# Altium PCB v0.0.PcbDoc
Units mil, origin at the board's own origin, x right, y up, seen from the top; angles counter-clockwise.
Board outline 6000 x 4000 mil, 2 copper layers (Top Layer, Bottom Layer); 48 components, 45 nets, 189 pads, 19 vias.
Unrouted connection lines stored in the file: 83.
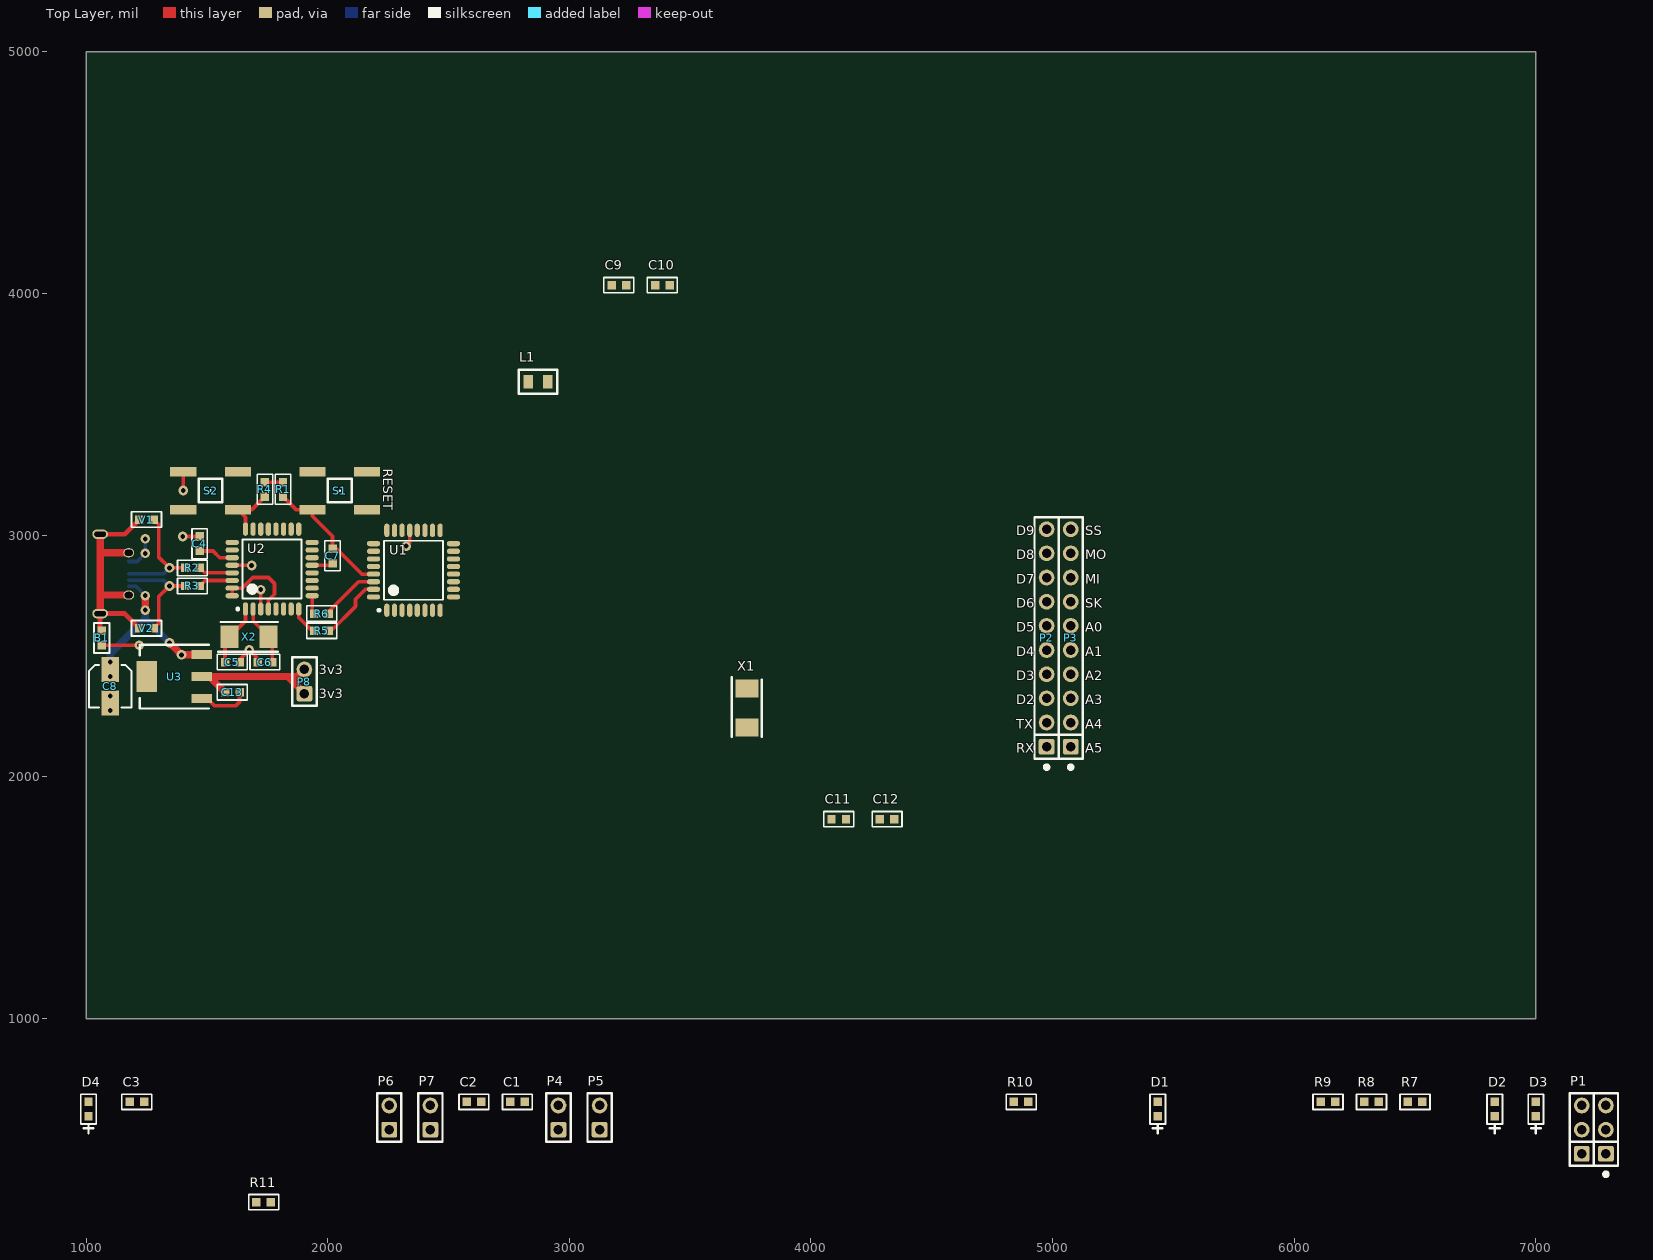
[diagram p0: Top Layer view]
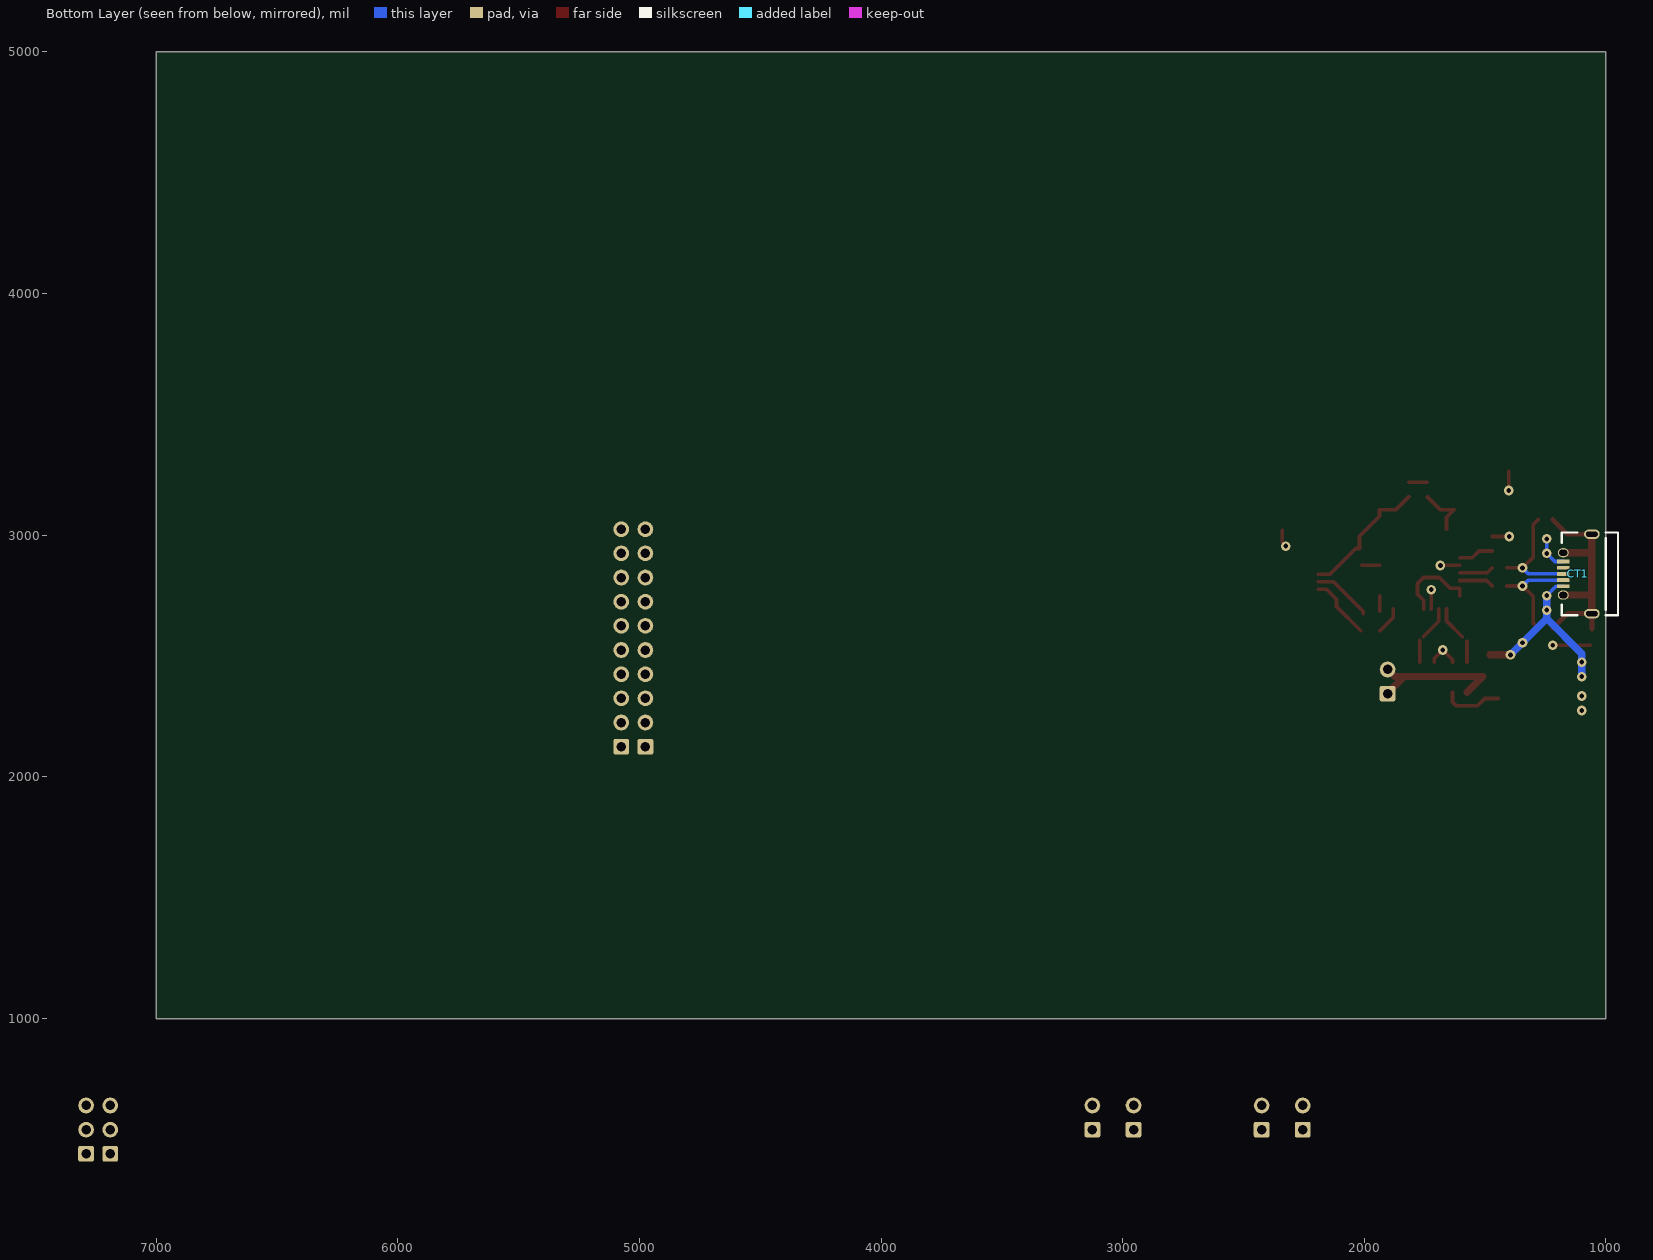
[diagram p1: Bottom Layer view, seen from below]

## Layer stack, top to bottom
Top Solder: solder mask 0.4, Solder Resist, Dk 3.5
Top Layer: signal copper 1.4
Dielectric 1: dielectric 12.6, FR-4, Dk 4.8
Bottom Layer: signal copper 1.4
Bottom Solder: solder mask 0.4, Solder Resist, Dk 3.5

## Board outline
1000,1000 7000,1000 7000,5000 1000,5000

## Design rules (kind name [scope] priority, off if disabled: settings)
Clearance [All] p1: gap=10 ignorepadtopadclearanceinfootprint=FALSE except(0: Arc-Hole Track-Hole SMDPad-Hole THPad-Hole Via-Hole Fill-Hole Poly-Hole Region-Hole Text-Hole)
PolygonConnect [All] p1: connectstyle=Relief reliefconductorwidth=10 reliefentries=4 polygonreliefangle="90 Angle" airgapwidth=10
RoutingVias [All] p1: holewidth=28 width=50 viastyle="Through Hole" minholewidth=28 minwidth=50 maxholewidth=28 maxwidth=50
SolderMaskExpansion [All] p1: expansion=4
Width [All] p1: maxlimit=50 minlimit=10 preferedwidth=15 minimp=50.000000 maximp=50.000000 favimp=50.000000
30 further rules are at their usual default settings.

## Components (designator, comment, footprint, x,y, rotation, side; value= is the part's Value field where it differs from the comment)
B1 "Ferrite Bead" smd0603 1065,2575 r270 top
C1 "Cap" SMD0603_cap 2785,655 r0 top value=100n
C2 "Cap" SMD0603_cap 2605,655 r0 top value=18p
C3 "Cap" SMD0603_cap 1210,655 r0 top value=18p
C4 "Cap" SMD0603_cap 1470,2965 r90 top value=1uF
C5 "Cap" SMD0603_cap 1605,2475 r0 top value=18p
C6 "Cap" SMD0603_cap 1740,2475 r180 top value=18p
C7 "Cap" SMD0603_cap 2020,2915 r90 top value=100n
C8 "Cap" cap_radial_b 1100,2375 r270 top value=22u
C9 "Cap" SMD0603_cap 3205,4035 r0 top value=100n
C10 "Cap" SMD0603_cap 3385,4035 r0 top value=100n
C11 "Cap" SMD0603_cap 4115,1825 r0 top value=100n
C12 "Cap" SMD0603_cap 4315,1825 r0 top value=100n
C13 "Cap" SMD0603_cap 1605,2350 r0 top value=22u
CT1 "Header" MICROUSB_2 1070,2840 r90 bottom
D1 "LED" "SMD0603 POLARIZED" 5435,625 r90 top
D2 "LED" "SMD0603 POLARIZED" 6830,625 r90 top
D3 "LED" "SMD0603 POLARIZED" 7000,625 r90 top
D4 "LED" "SMD0603 POLARIZED" 1010,625 r90 top
L1 "Inductor" SMD0805 2870,3635 r0 top value=2.2u
P1 "ICSP Header" "Header 2x3" 7290,440 r90 top
P2 "Header 10x1" "header 10x1" 4975,2125 r90 top
P3 "Header 10x1" "header 10x1" 5075,2125 r90 top
P4 "Header" "Header 2x1" 2955,540 r90 top
P5 "Header" "Header 2x1" 3125,540 r90 top
P6 "Header" "Header 2x1" 2255,540 r90 top
P7 "Header" "Header 2x1" 2425,540 r90 top
P8 "Header" "Header 2x1" 1903.74,2344.45 r90 top
R1 "Res" SMD0603 1815,3190 r90 top value=200k
R2 "Res" SMD0603 1440,2865 r180 top value=22
R3 "Res" SMD0603 1440,2790 r180 top value=22
R4 "Res" SMD0603 1740,3190 r90 top value=200k
R5 "Res" SMD0603 1974.76,2605 r180 top value=1k
R6 "Res" SMD0603 1975,2675.63 r180 top value=1k
R7 "Res" SMD0603 6500,655 r0 top value=1k
R8 "Res" SMD0603 6320,655 r0 top value=1k
R9 "Res" SMD0603 6140,655 r0 top value=NC
R10 "Res" SMD0603 4870,655 r0 top value=1k
R11 "Res" SMD0603 1735,240 r0 top value=1k
S1 "Pushbutton" pushbutton_smd 2050,3185 r0 top
S2 "Pushbutton" pushbutton_smd 1515,3185 r180 top
U1 "ATMega328P_SMD" tqfp-32 2355,2855 r90 top
U2 "ATMega16U2" tqfp-32 1770,2860 r90 top
U3 "AZ1117CH" SOT-223 1365,2415 r90 top
V1 "Varistor" smd0603 1250,3065 r0 top
V2 "Varistor" smd0603 1250,2615 r0 top
X1 "Crystal" crystal_smd_2pin 3735,2285 r90 top
X2 "Crystal" crystal_smd_2pin 1675,2580 r180 top

## Footprints (in the part's own frame and the unit in brackets; to place one, negate y for a bottom-side part, rotate by r counter-clockwise, add the part's x,y. Pads: shape width x height; smd on the part's side, far side on the other; paste and mask are expansions set on the pad)
cap_radial_b [mm] "Aluminum Electrolytic Capacitor, Body 4.30x4.30x5.80mm, IPC Low Density"
  rect 2.65x1.8 smd: 1(-1.75,0) 2(1.75,0)
  silkscreen extent -2.25,-2.25 2.25,2.25, body extent -2.3,-2.25 2.3,2.25, height 5.8
crystal_smd_2pin [mm]
  rect 1.9x2.4 smd paste+0 mask+0: 1(-2.05,0) 2(2.05,0)
  silkscreen extent -3,-1.55 3.25,1.6, body extent -2.5,-1.55 2.5,1.65, height 1.3
"Header 2x1" [mil] "PinHeader 1x2 TH Pitch 2.54mm"
  rrect25% 65x65 hole 39.37: 1(0,0)
  round 65 hole 39.37: 2(100,0)
  silkscreen extent -50,-50 150,50, body extent -50,-50 150,50, height 374
"Header 2x3" [mil]
  rrect25% 65x65 hole 39.37: 1(0,0) 2(0,100)
  round 65 hole 39.37: 3(100,0) 4(100,100) 5(200,0) 6(200,100)
  silkscreen extent -91,-50 250,150, body extent -50,-50 250,150, height 374
"header 10x1" [mil] "PinHeader 1x10 TH Pitch 2.54mm"
  rrect25% 65x65 hole 39.37: 1(0,0)
  round 65 hole 39.37: 2(100,0) 3(200,0) 4(300,0) 5(400,0) 6(500,0) 7(600,0) 8(700,0) 9(800,0) 10(900,0)
  silkscreen extent -91,-50 950,50, body extent -50,-50 950,50, height 374
MICROUSB_2 [mm]
  rect 0.4x1.35 smd mask+0.025: 1(-1.3,2.7) 2(-0.65,2.7) 3(0,2.7) 4(0.65,2.7) 5(1.3,2.7)
  oval 1x1.65 hole 0.55 slot 1.2 at 90 deg: S(-4.175,-0.3) S(4.175,-0.3)
  oval 0.95x1.15 hole 0.85 slot 0.65 at 0 deg: S(-2.225,2.7)
  oval 0.95x1.15 hole 0.85 slot 0.65 at 0 deg mask+0.051: S(2.225,2.7)
  silkscreen extent -4.35,-3.05 4.35,2.85, body extent -4.33,-3.05 4.32,2.84, height 2.69
pushbutton_smd [mm] "6.2mm"
  rect 2.75x1 smd paste+0 mask+0: 1(-2.875,2) 2(2.875,2) 3(-2.875,-2) 4(2.875,-2)
  silkscreen extent -1.25,-1.25 1.25,1.25, body extent -3.1,-3.1 3.1,3.1, height 3.4
smd0603 [mil]
  rect 35x35 smd: 1(-30,0) 2(30,0)
  silkscreen extent -62,-32 62,32, body extent -31,-16 32,16, height 18
SMD0603 [mil]
  rect 35x35 smd: 1(-30,0) 2(30,0)
  silkscreen extent -62,-32 62,32, body extent -31,-16 32,16, height 18
"SMD0603 POLARIZED" [mil]
  rect 35x35 smd: 1(-30,0) 2(30,0)
  silkscreen extent -100,-32 62,32, body extent -31,-16 32,16, height 18
SMD0603_cap [mil]
  rect 35x35 smd: 1(-30,0) 2(30,0)
  silkscreen extent -62,-32 62,32, body extent -37,-22 30,14, height 35
SMD0805 [mil]
  rect 40x55 smd: 1(-40,0) 2(40,0)
  silkscreen extent -80,-50 80,50, body extent -39,-25 39,24, height 20
SOT-223 [mm]
  rect 0.95x2.15 smd mask+0.076: 1(-2.3,-2.9) 2(0,-2.9) 3(2.3,-2.9)
  rect 3.25x2.15 smd mask+0.076: ""(0,2.9)
  silkscreen extent -3.35,-3.65 3.35,3.65, body extent -3.35,-3.65 3.35,3.65, height 1.8
tqfp-32 [mm] "TQFP, 32-Leads, Body 7.00x7.00mm, Pitch 0.80mm, IPC Medium Density"
  oval 1.4x0.55 smd: 1(-4.2,2.8) 2(-4.2,2) 3(-4.2,1.2) 4(-4.2,0.4) 5(-4.2,-0.4) 6(-4.2,-1.2) 7(-4.2,-2) 8(-4.2,-2.8) 17(4.2,-2.8) 18(4.2,-2) 19(4.2,-1.2) 20(4.2,-0.4) 21(4.2,0.4) 22(4.2,1.2) 23(4.2,2) 24(4.2,2.8)
  oval 0.55x1.4 smd: 9(-2.8,-4.2) 10(-2,-4.2) 11(-1.2,-4.2) 12(-0.4,-4.2) 13(0.4,-4.2) 14(1.2,-4.2) 15(2,-4.2) 16(2.8,-4.2) 25(2.8,4.2) 26(2,4.2) 27(1.2,4.2) 28(0.4,4.2) 29(-0.4,4.2) 30(-1.2,4.2) 31(-2,4.2) 32(-2.8,4.2)
  silkscreen extent -4.32,-3.1 3.1,3.75, body extent -4.5,-4.5 4.5,4.5, height 1.2

## Part data
C1 C2 C3 C4 C5 C6 C7 C9 C10 C11 C12 C13: library part "Capacitor Ceramic", "Ceramic Chip Capacitor"
C8: library part "Capacitor Polarized", "Polarized Capacitor (Surface Mount)"
CT1: library part MICROUSB, "Micro USB"
P4 P5 P6 P7 P8: library part "Header 2x1", "Header, 2-Pin"
R1 R2 R3 R4 R5 R6 R7 R8 R9 R10 R11: library part Resistor, "Resistor"
L1: Code_IEC=1005, Code_JEITA=0402, LatestRevisionDate=29-May-2009, LatestRevisionNote="IPC-7351 Footprint Added.", PackageDescription="Chip Inductor", PackageReference=0402-A, Published=8-Jun-2000, Publisher="Altium Limited"

## Via types
v1: diameter 40, hole 20, Top Layer to Bottom Layer, 19 vias

## Nets (pads, with @x,y where several pads share a name; then routed paths per layer and width w, separated by ;. In a path a pad name is that pad's centre, name@x,y a point inside that pad or via, vN(x,y) a via of type N, cw(c..) or ccw(c..) an arc to the next point about the centre after c; other vN are vias at no path point)
3v3: C13.1 P8.1 P8.2 U3.2 | length 596.9
  Top Layer w30: C13.1 1510,2415 1835,2415 ; P8.1 1903.74,2346.26 1835,2415 ; P8.2 1874.29,2415 1835,2415
5v0: C8.1 C9.1 C10.1 C11.1 C12.1 CT1.1 D1.1 D2.1 D3.1 L1.1 P1.2 P5.1 P5.2 P7.1 P7.2 R1.2 R4.2 U1.4 U1.6 U1.20 U2.4 U2.31 U2.32 U3.3 | length 1333.2
  Top Layer w15: U2.32 U2.31 1646.26,2781.26 1690,2825 1755,2825 1780,2800 1780,2755.75 1754.25,2730 U2.4 ; R4.2 R1.2
  Top Layer w30: v1(1245,2690) v1(1245,2750) ; v1(1345,2555) v1(1395,2505) U3.3@1479.17,2505
  Bottom Layer w15: CT1.1 1206.18,2788.82 v1(1245,2750)
  Bottom Layer w30: v1(1100,2415) v1(1100,2475) 1100,2510 1245,2655 ; v1(1245,2750) v1(1245,2690) 1245,2655 ; v1(1395,2505) v1(1345,2555) 1245,2655
A0: P3.6 U1.23
A1: P3.5 U1.24
A2: P3.4 U1.25
A3: P3.3 U1.26
A4: P3.2 U1.27
A5: P3.1 U1.28
D2: P2.3 U1.32
D3: P2.4 U1.1
D4: P2.5 U1.2
D5: P2.6 U1.9
D6: P2.7 U1.10
D7: P2.8 U1.11
D8: D4.1 P2.9 U1.12
D9: P2.10 U1.13
D+: R2.1 U2.29 | length 143.2
  Top Layer w15: R2.1 1490.75,2844.25 U2.29
D-: R3.1 U2.30 | length 144.1
  Top Layer w15: R3.1 1492.76,2812.76 U2.30
GND: B1.2 C1.2 C2.2 C3.2 C4.2 C5.2 C6.2 C8.2 C9.2 C10.2 C11.2 C12.2 C13.2 CT1.5 P1.6 P4.1 P4.2 P6.1 P6.2 R9.2 R10.2 R11.2 S1.2 S2.4 U1.3 U1.5 U1.21 U2.3 U2.28 U3.1 | length 1056.6
  Top Layer w15: B1.2 1130,2545 v1(1220,2545) ; v1(1400,2995) C4.2 ; v1(1401.81,3185) S2.4 ; U3.1@1445.55,2324.45 U3.1 1500.55,2324.45 1530,2295 1620,2295 1635,2310 C13.2 ; U2.28 v1@1684.25,2875.75 ; C5.2 1635,2485 v1(1675,2525) 1710,2490 C6.2 ; U2.3 v1(1722.76,2775) ; v1(2325,2955) 2339.25,2969.25 U1.21
  Bottom Layer w15: CT1.5 1211.18,2891.18 v1(1245,2925) v1(1245,2985)
  other v1: 1100,2275 1100,2335 1685,2875
MISO: P1.1 P3.8 U1.16
MOSI: P1.4 P3.9 U1.15
NetC1_1: C1.1 L1.2 U1.18
NetC2_1: C2.1 U1.7 X1.2
NetC3_1: C3.1 U1.8 X1.1
NetC4_1: C4.1 U2.27 | length 146.1
  Top Layer w15: C4.1 1525,2935 1552.76,2907.24 U2.27
NetC5_1: C5.1 U2.1 X2.2 | length 227.5
  Top Layer w15: C5.1 X2.2@1575,2560.71 ; X2.2 1659.76,2645.47 U2.1
NetC6_1: C6.1 U2.2 X2.1 | length 232
  Top Layer w15: U2.2 1691.26,2644.45 X2.1 ; C6.1 X2.1@1770,2565.71
NetC7_1: C7.1 R9.1 U2.13 | length 75.4
  Top Layer w15: U2.13 C7.1@2010.75,2875.75
NetCT1_2: CT1.2 R3.2 V2.2 | length 446
  Top Layer w15: V2.2 1300,2635 1300,2745 v1(1345,2790) R3.2
  Bottom Layer w15: CT1.2 1320,2814.41 v1@1345,2789.41
NetCT1_3: CT1.3 R2.2 V1.2 | length 471
  Top Layer w15: V1.2 1300,3045 1300,2910 v1(1345,2865) R2.2
  Bottom Layer w15: CT1.3 1320,2840 v1(1345,2865)
NetD1_2: D1.2 R10.1
NetD2_2: D2.2 R8.2
NetD3_2: D3.2 R7.2
NetD4_2: D4.2 R11.1
NetR4_1: R4.1 S2.1 U2.24 | length 228.1
  Top Layer w15: U2.24 1659.76,3074.68 S2.1 1686.26,3106.26 R4.1
NetR7_1: R7.1 U2.10
NetR8_1: R8.1 U2.11
RST: C7.2 P1.5 R1.1 S1.3 U1.29 | length 553.2
  Top Layer w15: R1.1 1868.74,3106.26 S1.3 1936.81,3078.54 2020,2995.35 C7.2 2035,2945 2140.75,2839.25 U1.29
RX: P2.1 R6.1 U1.30 | length 244.9
  Top Layer w15: R6.1 2005,2685 2127.76,2807.76 U1.30
SCK: P1.3 P3.7 U1.17
SS: P3.10 U1.14
TX: P2.2 R5.1 U1.31 | length 263.4
  Top Layer w15: R5.1@2014.53,2605 2115,2705.47 2115,2735 2156.26,2776.26 U1.31
USBRX: R5.2 U2.8 | length 112.3
  Top Layer w15: U2.8 1880.24,2659.76 R5.2@1935,2605
USBTX: R6.2 U2.9 | length 64.5
  Top Layer w15: R6.2@1935.35,2685.28 U2.9
uShield: B1.1 CT1.S V1.1 V2.1 | length 997.6
  Top Layer w20: B1.1@1058.19,2611.81 1058.19,2675.63 1159.37,2675.63 V2.1 ; CT1.S@1058.19,3004.37 1159.37,3004.37 V1.1
  Top Layer w30: CT1.S@1058.19,2675.63 CT1.S@1058.19,3004.37 ; 1060.59,2927.6 CT1.S@1176.3,2927.6 ; 1060.79,2752.4 CT1.S@1176.3,2752.4
pads on no net: CT1.4 S1.1 S1.4 S2.2 S2.3 U1.19 U1.22 U2.5 U2.6 U2.7 U2.12 U2.14 U2.15 U2.16 U2.17 U2.18 U2.19 U2.20 U2.21 U2.22 U2.23 U2.25 U2.26 U3.

## Silkscreen, mask and mechanical layers (free items; w line width, h text height)
Top Overlay:
  text "RESET" at 2230,3275 h40 r270
  text "D9" at 4850,3000 h40
  text "SS" at 5135,3000 h40
  text "D8" at 4850,2900 h40
  text "MO" at 5135,2900 h40
  text "D7" at 4850,2800 h40
  text "MI" at 5135,2800 h40
  text "D6" at 4850,2700 h40
  text "SK" at 5135,2700 h40
  text "D5" at 4850,2600 h40
  text "A0" at 5135,2600 h40
  text "D4" at 4850,2500 h40
  text "A1" at 5135,2500 h40
  text "3v3" at 1963.74,2424.45 h40
  text "D3" at 4850,2400 h40
  text "A2" at 5135,2400 h40
  text "3v3" at 1963.74,2324.45 h40
  text "D2" at 4850,2300 h40
  text "A3" at 5135,2300 h40
  text "TX" at 4850,2200 h40
  text "A4" at 5135,2200 h40
  text "RX" at 4850,2100 h40
  text "A5" at 5135,2100 h40